# EAGLE board syma_mod (EAGLE 6.5.0)

Size 100 x 80 mm. Coordinates in mm from the lower left corner, seen from the top.
Outline: 0,0 100,0 100,80 0,80 0,0
Copper layers (1*16): Top 0.035mm / dielectric 1.5mm / Bottom 0.035mm
Design rules "default": minimum track width 10mil, minimum drill 24mil, track to track 8mil, track to pad 8mil, pad to pad 8mil, via to via 8mil, smd to smd 8mil, copper to edge 40mil, drill to drill 8mil, minimum pad ring 10mil, minimum via ring 8mil, stop-mask expansion 4mil, vias tented up to drill 0mil, thermal gap 10mil
Net classes: 0 default: width 0.203 mm; 1 vcc: width 0.254 mm

## Footprints (pad centres in the part's own frame; a part is rotated, then mirrored left to right if it is on the bottom)
C0603 = smd 1.1 x 1: 1 -0.85,0; 2 0.85,0
C0402 = smd 0.7 x 0.9: 1 -0.65,0; 2 0.65,0
MINIMELF = smd 1.4 x 1.8: A 1.7,0; C -1.7,0
LED-0603 = smd 0.8 x 0.8: A 0,-0.75; C 0,0.75
MOTOR-CORNER-2 = drill 0.9 pad 1.676 square: A@1 -1.27,-5.715; B@1 1.27,-5.715 | drill 0.5 square: A@2 -1.27,-4.445; B@2 1.27,-4.445 | drill 0.5: P$1 -1.587,-2.54; P$2 1.587,-2.54
SOT23 = smd 1 x 1.4: 1 -0.95,-1.1; 2 0.95,-1.1; 3 0,1.1
RESONATOR-SMD = smd 0.7 x 1.7: 1 -1.2,0; 2 0,0; 3 1.2,0
SOT23-3 = smd 0.8 x 0.9: 1 -0.95,-1; 2 0.95,-1; 3 0,1.1
R0603 = smd 1 x 1.1: 1 -0.85,0; 2 0.85,0
TACTILE_SWITCH_SMD = smd 1.524 x 0.762: 1 -2.54,1.905; 2 2.54,1.905; 3 -2.54,-1.905; 4 2.54,-1.905
SJW = smd 1.27 x 2.54: 1 -1.27,0; 2 1.27,0
TQFP32-08 = smd 1.27 x 0.559: 1 -4.293,2.8; 2 -4.293,2; 3 -4.293,1.2; 4 -4.293,0.4; 5 -4.293,-0.4; 6 -4.293,-1.2; 7 -4.293,-2; 8 -4.293,-2.8; 17 4.293,-2.8; 18 4.293,-2; 19 4.293,-1.2; 20 4.293,-0.4; 21 4.293,0.4; 22 4.293,1.2; 23 4.293,2; 24 4.293,2.8 | smd 0.559 x 1.27: 9 -2.8,-4.293; 10 -2,-4.293; 11 -1.2,-4.293; 12 -0.4,-4.293; 13 0.4,-4.293; 14 1.2,-4.293; 15 2,-4.293; 16 2.8,-4.293; 25 2.8,4.293; 26 2,4.293; 27 1.2,4.293; 28 0.4,4.293; 29 -0.4,4.293; 30 -1.2,4.293; 31 -2,4.293; 32 -2.8,4.293

## Placement (x,y rotation side)
C1  470p  [C0603]  -36.83,30.48 0 top  (outside the outline)
C2  0.1uF  [C0402]  -15.24,45.72 0 top  (outside the outline)
C3  0.1uF  [C0402]  -19.05,45.72 0 top  (outside the outline)
C4  0.1uF  [C0402]  -22.86,45.72 0 top  (outside the outline)
C5  470p  [C0603]  -43.18,30.48 0 top  (outside the outline)
C6  470p  [C0603]  -17.78,35.56 0 top  (outside the outline)
C7  470p  [C0603]  -24.13,35.56 0 top  (outside the outline)
D1  [MINIMELF]  -27.94,39.37 0 top  (outside the outline)
D2  [MINIMELF]  -33.02,39.37 0 top  (outside the outline)
D3  Green  [LED-0603]  -34.29,45.72 0 top  (outside the outline)
D4  [MINIMELF]  -38.1,39.37 0 top  (outside the outline)
D5  [MINIMELF]  -43.18,39.37 0 top  (outside the outline)
M1  MOTORARM-CORNER  [MOTOR-CORNER-2]  -26.67,7.62 0 top  (outside the outline)
M2  MOTORARM-CORNER  [MOTOR-CORNER-2]  -33.02,7.62 0 top  (outside the outline)
M3  MOTORARM-CORNER  [MOTOR-CORNER-2]  -39.37,7.62 0 top  (outside the outline)
M4  MOTORARM-CORNER  [MOTOR-CORNER-2]  -16.51,20.32 0 top  (outside the outline)
Q1  BSS84  [SOT23]  -24.13,17.78 0 top  (outside the outline)
Q2  BSS84  [SOT23]  -31.75,17.78 0 top  (outside the outline)
Q3  BSS84  [SOT23]  -39.37,17.78 0 top  (outside the outline)
Q4  #MHz  [RESONATOR-SMD]  -22.86,40.64 0 top  (outside the outline)
Q5  DMN2075U  [SOT23-3]  -38.1,35.56 0 top  (outside the outline)
Q6  DMN2075U  [SOT23-3]  -41.91,35.56 0 top  (outside the outline)
Q7  DMN2075U  [SOT23-3]  -15.24,40.64 0 top  (outside the outline)
Q8  DMN2075U  [SOT23-3]  -19.05,40.64 0 top  (outside the outline)
R7  680K  [R0603]  -40.64,24.13 0 top  (outside the outline)
R8  10K  [R0603]  -29.21,35.56 0 top  (outside the outline)
R9  20K  [R0603]  -34.29,35.56 0 top  (outside the outline)
R10  10K  [C0402]  -26.67,45.72 0 top  (outside the outline)
R11  330  [C0402]  -30.48,45.72 0 top  (outside the outline)
R12  680K  [R0603]  -17.78,30.48 0 top  (outside the outline)
R13  680K  [R0603]  -24.13,30.48 0 top  (outside the outline)
R14  680K  [R0603]  -30.48,30.48 0 top  (outside the outline)
S2  Reset  [TACTILE_SWITCH_SMD]  -16.51,24.13 0 top  (outside the outline)
SJ1  [SJW]  -22.86,24.13 0 top  (outside the outline)
SJ2  [SJW]  -27.94,24.13 0 top  (outside the outline)
SJ3  [SJW]  -33.02,24.13 0 top  (outside the outline)
U1  ATMEGA168#  [TQFP32-08]  -17.78,7.62 0 top  (outside the outline)

## Library data of the parts
C1 C5-C7 R7-R9 R12-R14 = rcl
C2-C4 D3 Q4 R10 R11 S2 U1 = SparkFun
D1 D2 D4 D5 M1-M4 Q5-Q8 = palmquad_alpha
Q1-Q3 = transistor-small-signal
SJ1-SJ3 = jumper

## Nets
A0: U1.23
A1: U1.24
A2: U1.25
A3: U1.26
A4: U1.27
A5: U1.28
AREF: C2.2 U1.20
CAM_TRIG(PB4,D12): R8.2
D2: U1.32
D3: C1.1 R7.2 U1.1
D4: U1.2
D5: U1.9
D6: U1.10
D7: U1.11
D8: U1.12
D9: C7.1 R14.2 U1.13
D10: C5.1 R12.2 U1.14
DTR: C4.2
GND: C2.1 C3.1 D3.C Q4.2 Q5.2 Q6.2 Q7.2 Q8.2 R7.1 R9.1 R12.1 R13.1 R14.1 S2.1 S2.2 U1.3 U1.5 U1.21
MISO: U1.16
MOSI: C6.1 R13.2 U1.15
N$1: Q2.3 SJ2.1
N$2: SJ2.2
N$3: Q2.1
N$4: Q3.3 SJ3.1
N$5: SJ3.2
N$6: Q3.1
N$7: Q1.3 SJ1.1
N$8: SJ1.2
N$9: Q1.1
N$10: D3.A R11.2
N$11: Q4.1 U1.8
N$12: Q4.3 U1.7
N$13: D2.A M1.B@1 Q6.3
N$14: C5.2 Q6.1
N$15: D4.A M2.B@1 Q7.3
N$16: C6.2 Q7.1
N$17: D5.A M3.B@1 Q8.3
N$18: C7.2 Q8.1
N$20: D1.A M4.B@1 Q5.3
N$45: C1.2 Q5.1
RESET: C4.1 R10.1 S2.3 S2.4 U1.29
RXI: U1.30
SCK: R11.1 U1.17
SYMA_CAM_TRIG: R8.1 R9.2
TXO: U1.31
VBATT: D1.C D2.C D4.C D5.C M1.A@1 M2.A@1 M3.A@1 M4.A@1
VCC: C3.2 Q1.2 Q2.2 Q3.2 R10.2 U1.4 U1.6 U1.18

## Tracks (layer width: path | path; a pad name or v marks a point on that pad's centre or on a via)
AREF  (1 unrouted)
D3  (2 unrouted)
D9  (2 unrouted)
D10  (2 unrouted)
GND  (17 unrouted)
MOSI  (2 unrouted)
N$1  (1 unrouted)
N$4  (1 unrouted)
N$7  (1 unrouted)
N$10  (1 unrouted)
N$11  (1 unrouted)
N$12  (1 unrouted)
N$13  (2 unrouted)
N$14  (1 unrouted)
N$15  (2 unrouted)
N$16  (1 unrouted)
N$17  (2 unrouted)
N$18  (1 unrouted)
N$20  (2 unrouted)
N$45  (1 unrouted)
RESET  (4 unrouted)
SCK  (1 unrouted)
SYMA_CAM_TRIG  (1 unrouted)
VBATT  (7 unrouted)
VCC  (7 unrouted)